# Altium PCB ADC-PCB.PcbDoc (part 1 of 2)
Units mil, origin at the board's own origin, x right, y up, seen from the top; angles counter-clockwise.
Board outline 3937.01 x 3937.01 mil, 2 copper layers (Top Layer, Bottom Layer); 145 components, 173 nets, 727 pads, 175 vias.
Unrouted connection lines stored in the file: 3.
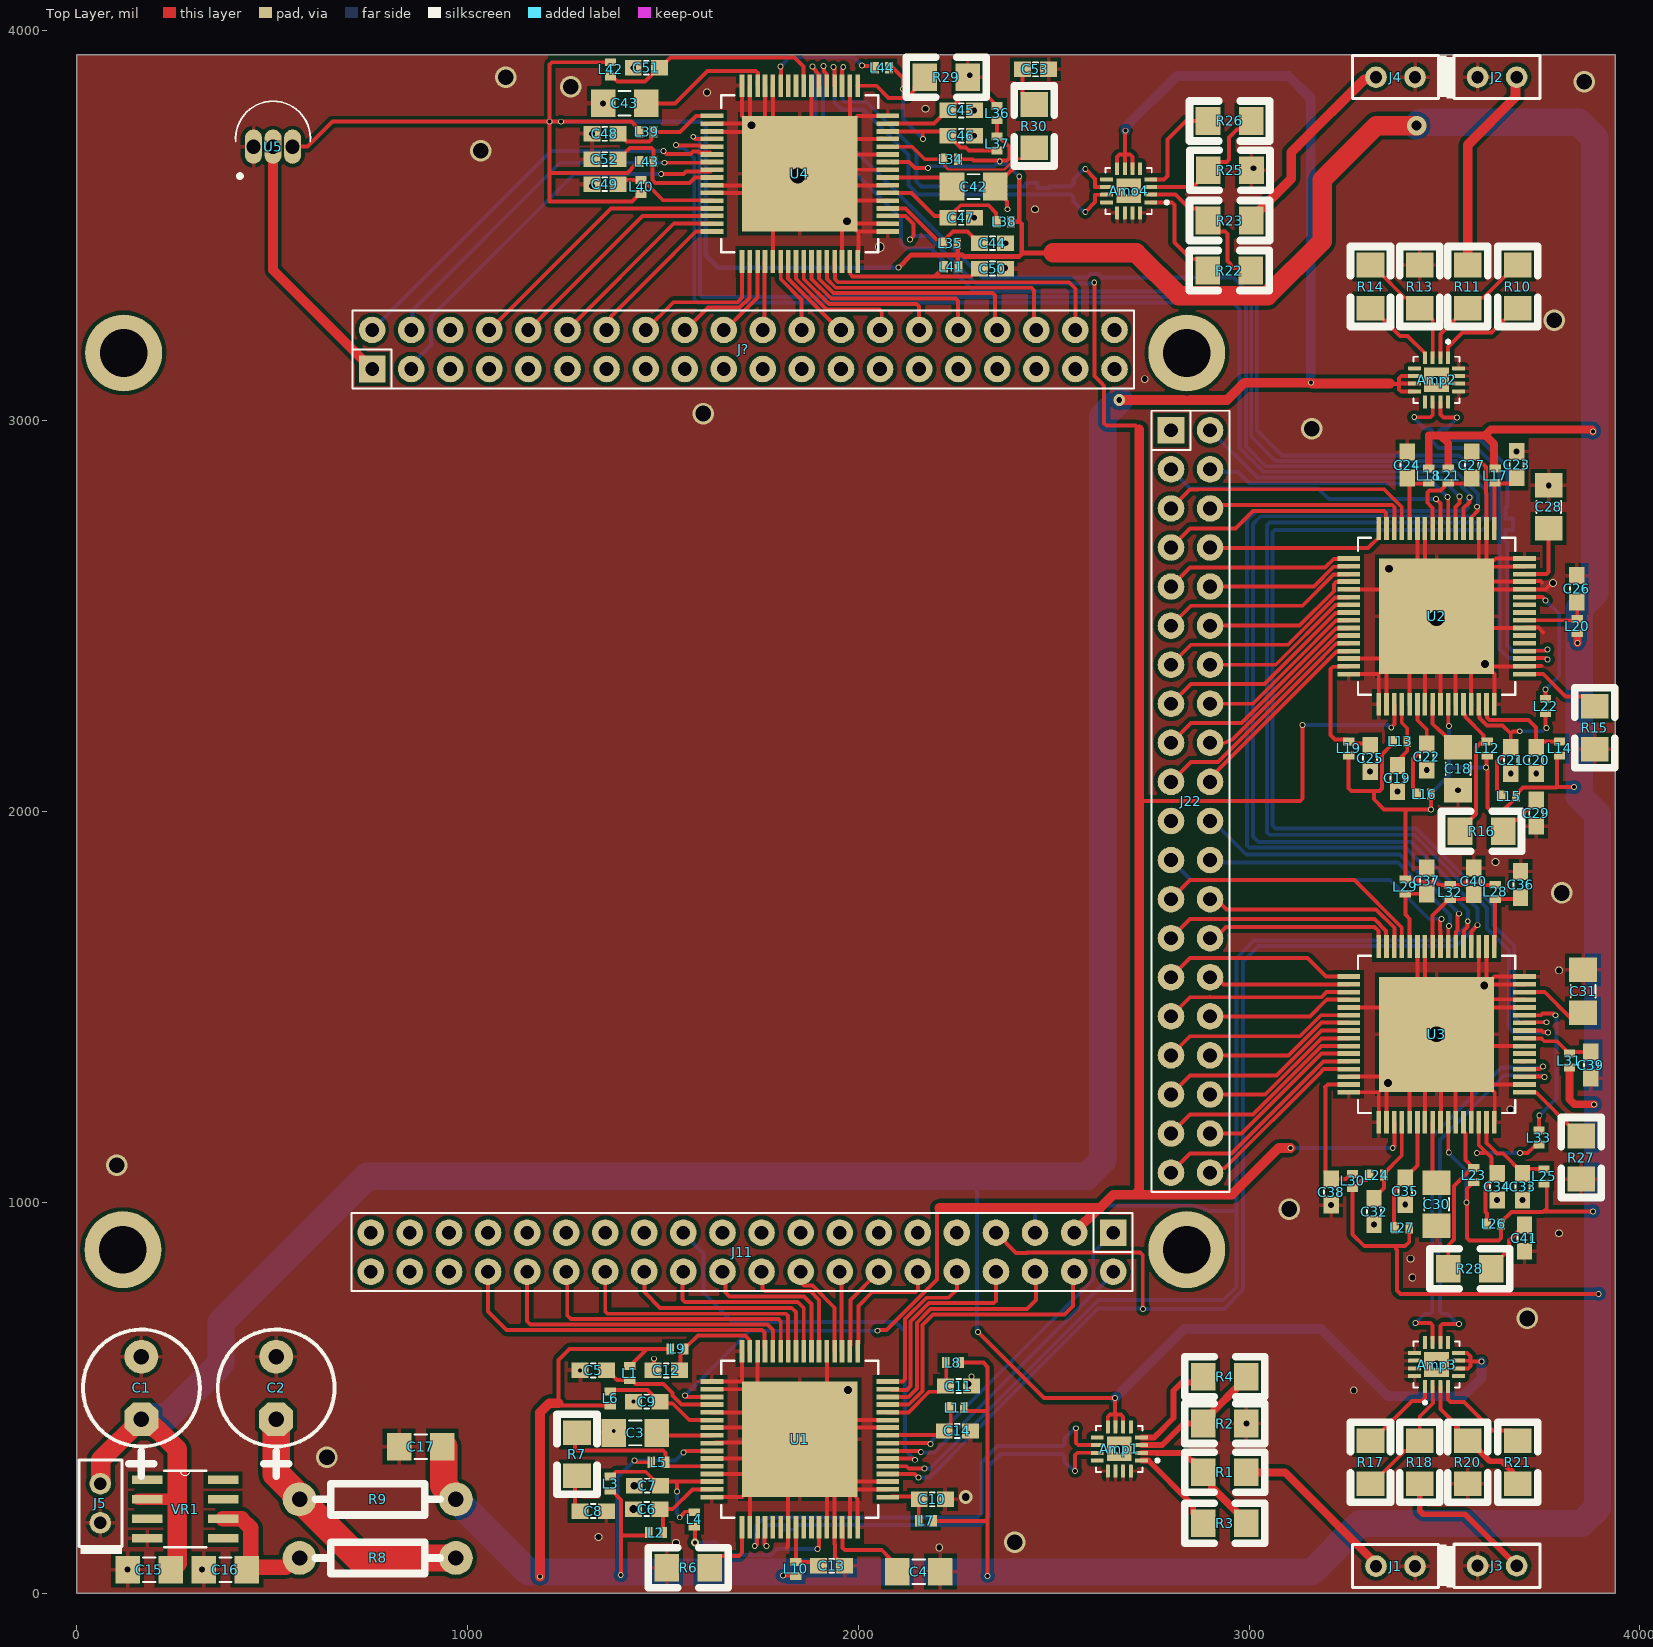
[diagram p0: Top Layer view]
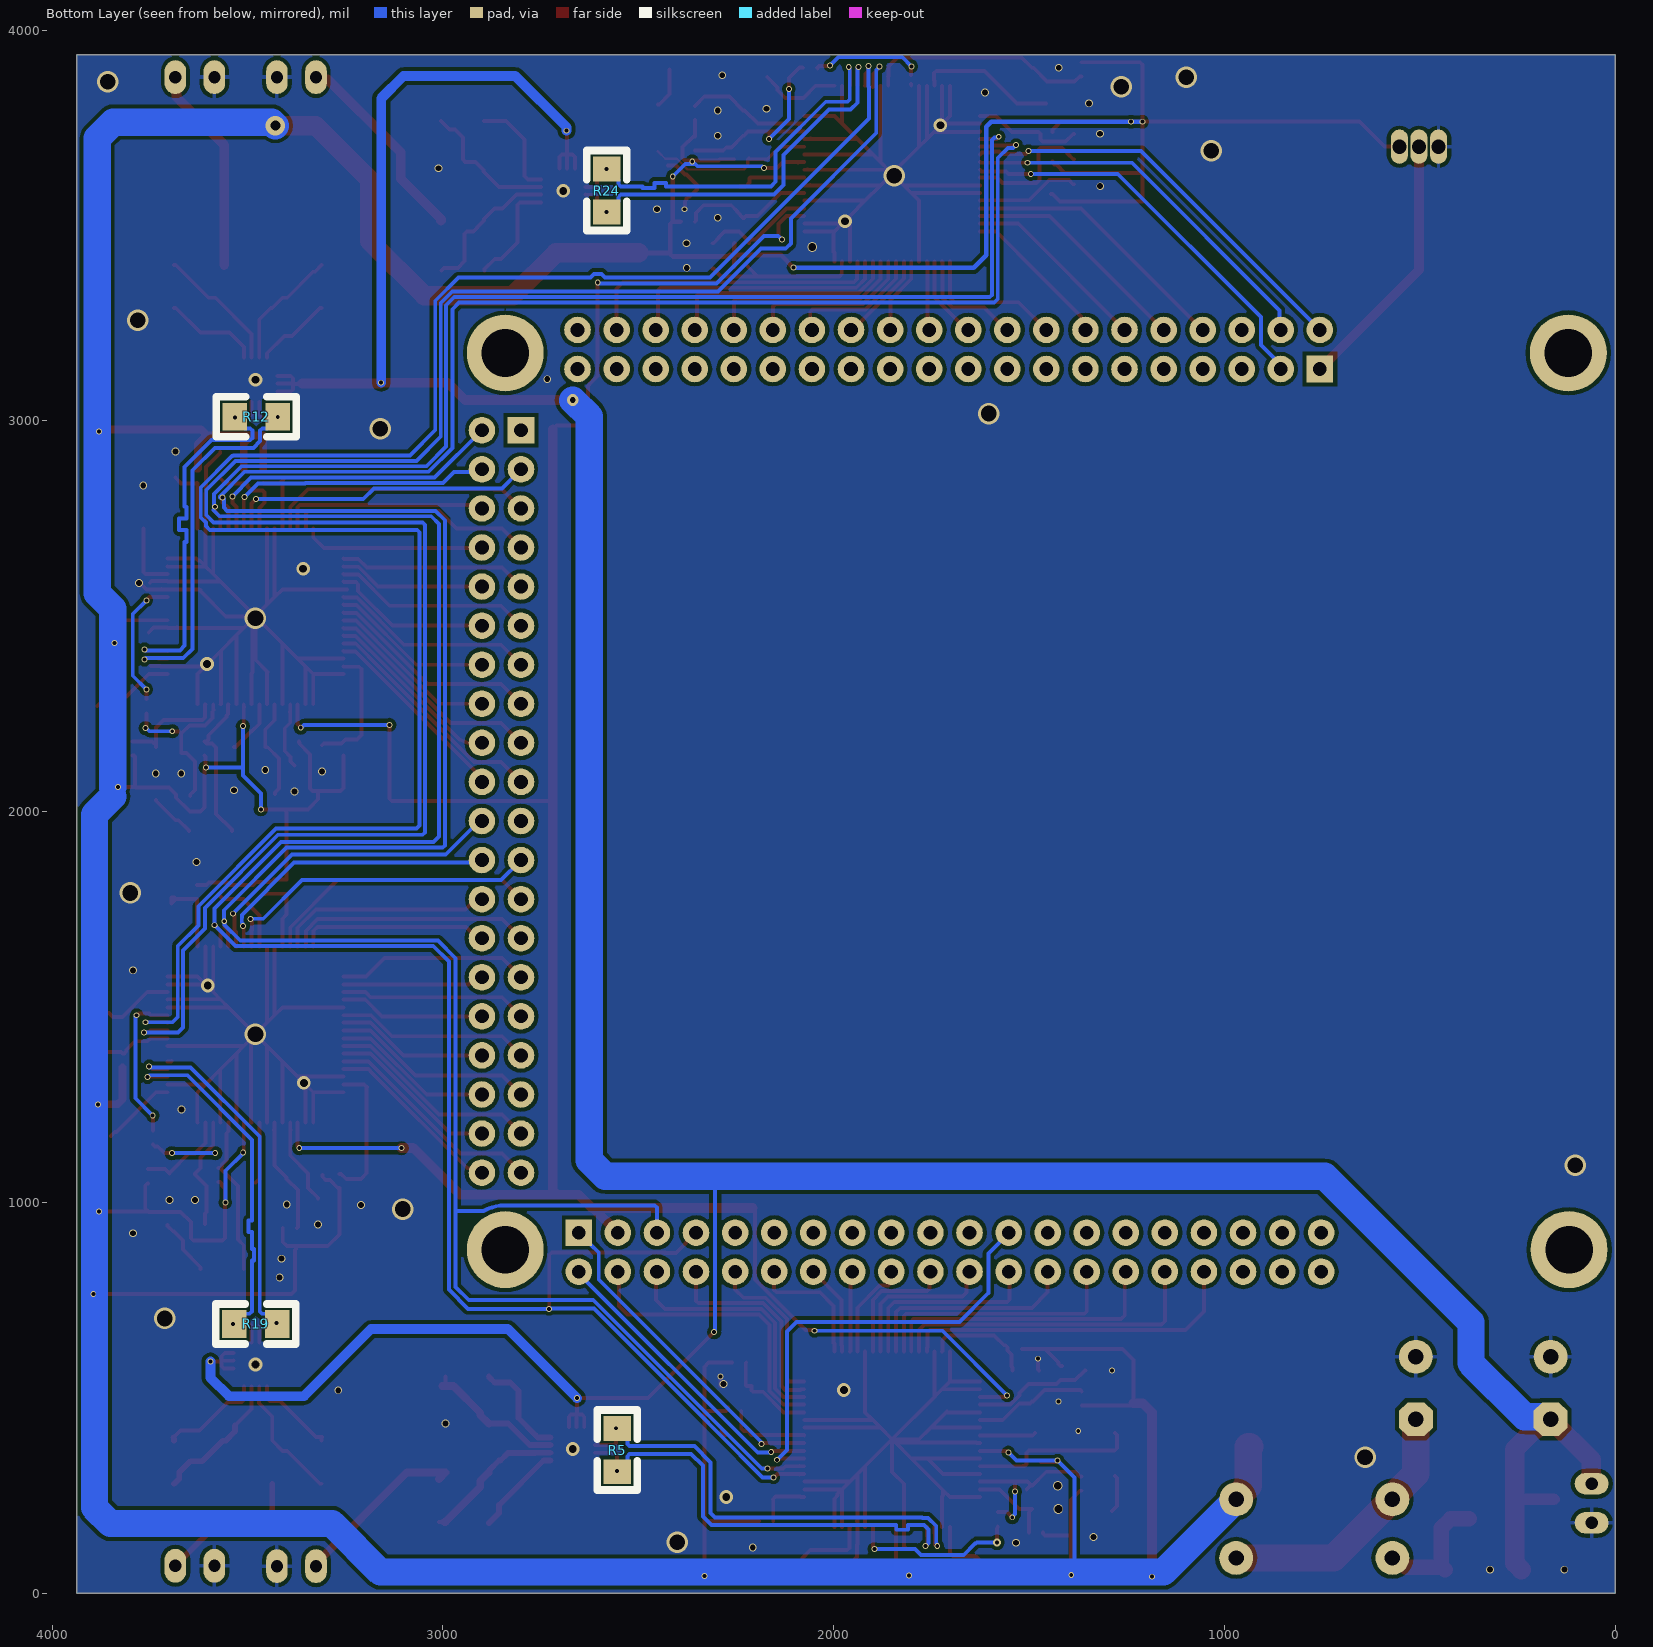
[diagram p1: Bottom Layer view, seen from below]

## Layer stack, top to bottom
Top Solder: solder mask 0.4, Solder Resist, Dk 3.5
Top Layer: signal copper 1.4
Dielectric5: dielectric 12.6, FR-4, Dk 4.8
Bottom Layer: signal copper 1.4
Bottom Solder: solder mask 0.4, Solder Resist, Dk 3.5

## Board outline
0,0 0,3937.01 3937.01,3937.01 3937.01,0

## Design rules (kind name [scope] priority, off if disabled: settings)
Clearance [All] p1: gap=10 ignorepadtopadclearanceinfootprint=FALSE except(0: Arc-Hole Track-Hole SMDPad-Hole THPad-Hole Via-Hole Fill-Hole Poly-Hole Region-Hole Text-Hole; 3.94: Arc-Arc Arc-Track Arc-SMDPad Track-Track Track-SMDPad SMDPad-SMDPad THPad-THPad)
DiffPairsRouting [All] p1: maxlimit=10 minlimit=5 mostfreqgap=10 toplayer_minwidth=5 toplayer_maxwidth=15 toplayer_prefwidth=15 bottomlayer_minwidth=5 bottomlayer_maxwidth=15 bottomlayer_prefwidth=15 maxuncoupledlength=500
PolygonConnect [All] p1: thpad.connectstyle=Relief thpad.reliefconductorwidth=10 thpad.reliefentries=4 thpad.polygonreliefangle="90 Angle" thpad.airgapwidth=10 smdpad.connectstyle=Relief smdpad.reliefconductorwidth=10 smdpad.reliefentries=4 smdpad.polygonreliefangle="90 Angle" smdpad.airgapwidth=10 via.connectstyle=Direct via.reliefconductorwidth=10 via.reliefentries=4 via.polygonreliefangle="90 Angle" via.airgapwidth=10
RoutingVias [All] p1: holewidth=50 width=50 viastyle="Through Hole" minholewidth=5 minwidth=5 maxholewidth=100 maxwidth=100
SolderMaskExpansion [All] p1: expansion=4 istentingtop=FALSE
Width [All] p1: maxlimit=100 minlimit=5 preferedwidth=10
29 further rules are at their usual default settings.

## Classes and differential pairs
differential pair OUT4: +OUT4_P -OUT4_N
differential pair OUT3: +OUT3_P -OUT3_N
differential pair OUT2: +OUT2_P -OUT2_N
differential pair OUT1: +OUT1_P -OUT1_N

## Components (designator, comment, footprint, x,y, rotation, side; value= is the part's Value field where it differs from the comment)
Amo4 "AD4945" AD4945 2692,3589 r180 top
Amp1 "AD4945" AD4945 2668,369 r180 top
Amp2 "AD4945" AD4945 3480,3105.39 r270 top
Amp3 "AD4945" AD4945 3480,585 r90 top
C1 "10uF" "CAP POL" 165,525 r90 top
C2 "100uF" "CAP POL" 510,525 r90 top
C3 "100nF" CAP-SMD 1429.13,410 r0 top
C4 "33pF" CAP-SMD 2154.88,55 r180 top
C5 "Cap0603" CAP0603 1321.54,570 r180 top
C6 "Cap0603" CAP0603 1458.46,215 r180 top
C7 "Cap0603" CAP0603 1460,275 r180 top
C8 "Cap0603" CAP0603 1321.54,210 r0 top
C9 "Cap0603" CAP0603 1458.5,490 r180 top
C10 "Cap0603" CAP0603 2189.46,240 r0 top
C11 "Cap0603" CAP0603 2256.54,530 r0 top
C12 "Cap0603" CAP0603 1508.46,570 r180 top
C13 "Cap0603" CAP0603 1931.54,70 r0 top
C14 "Cap0603" CAP0603 2253.46,415 r0 top
C15 "100nF" CAP-SMD 185.12,60 r180 top
C16 "100nF" CAP-SMD 380.12,60 r180 top
C17 "10nF" CAP-SMD 880,375 r180 top
C18 "100nF" CAP-SMD 3535,2110.12 r90 top
C19 "Cap0603" CAP0603 3380,2085 r270 top
C20 "Cap0603" CAP0603 3735,2131.54 r270 top
C21 "Cap0603" CAP0603 3670,2131.54 r270 top
C22 "Cap0603" CAP0603 3455,2140 r270 top
C23 "Cap0603" CAP0603 3685,2888.46 r90 top
C24 "Cap0603" CAP0603 3405,2887 r90 top
C25 "Cap0603" CAP0603 3310,2136.54 r270 top
C26 "Cap0603" CAP0603 3839,2570.54 r90 top
C27 "Cap0603" CAP0603 3570,2887 r90 top
C28 "33pF" CAP-SMD 3767,2780.12 r270 top
C29 "Cap0603" CAP0603 3735,1996.54 r270 top
C30 "100nF" CAP-SMD 3480,995.12 r90 top
C31 "33pF" CAP-SMD 3855,1540.12 r270 top
C32 "Cap0603" CAP0603 3320,976.54 r270 top
C33 "Cap0603" CAP0603 3700,1040 r270 top
C34 "Cap0603" CAP0603 3635,1040 r270 top
C35 "Cap0603" CAP0603 3400,1028.46 r270 top
C36 "Cap0603" CAP0603 3695,1813.46 r90 top
C37 "Cap0603" CAP0603 3455,1822.76 r90 top
C38 "Cap0603" CAP0603 3210,1026.54 r270 top
C39 "Cap0603" CAP0603 3875,1351.54 r270 top
C40 "Cap0603" CAP0603 3575,1822.01 r90 top
C41 "Cap0603" CAP0603 3705,908.46 r270 top
C42 "100nF" CAP-SMD 2295,3600 r180 top
C43 "33pF" CAP-SMD 1401.88,3813 r0 top
C44 "Cap0603" CAP0603 2343.46,3455 r0 top
C45 "Cap0603" CAP0603 2263.46,3795 r0 top
C46 "Cap0603" CAP0603 2263.46,3730 r0 top
C47 "Cap0603" CAP0603 2263.46,3520 r0 top
C48 "Cap0603" CAP0603 1351.54,3735 r180 top
C49 "Cap0603" CAP0603 1351.46,3606 r180 top
C50 "Cap0603" CAP0603 2343.46,3390 r0 top
C51 "Cap0603" CAP0603 1457.46,3904 r180 top
C52 "Cap0603" CAP0603 1351.54,3670 r180 top
C53 "Cap0603" CAP0603 2453.46,3900 r0 top
J1 "HDR" HDRLP_M_1X2 3375,69 r180 top value=HDRF2
J2 "HDR" HDRLP_M_1X2 3635,3880 r0 top value=HDRF2
J3 "HDR" HDRLP_M_1X2 3635,70 r0 top value=HDRF2
J4 "HDR" HDRLP_M_1X2 3375,3880 r180 top value=HDRF2
J5 "HDR" HDRLP_M_1X2 60,230 r90 top value=HDRF2
J11 "HDRF_2X20" ZUNQ 2652.34,912.7 r180 top locked
J22 "HDRF_2X20" ZUNQ 2810.34,2976.2 r270 top locked
J? "HDRF_2X20" ZUNQ 755.64,3143 r0 top locked
L1 "Inductor" INDC#1 1415,563.11 r90 top
L2 "Inductor" INDC#1 1481.89,155 r180 top
L3 "Inductor" INDC#1 1365,280 r270 top
L4 "Inductor" INDC#1 1580,189 r270 top
L5 "Inductor" INDC#1 1488.11,335 r180 top
L6 "Inductor" INDC#1 1365,498.11 r270 top
L7 "Inductor" INDC#1 2172.89,185 r0 top
L8 "Inductor" INDC#1 2241.89,590 r0 top
L9 "Inductor" INDC#1 1536.89,625 r180 top
L10 "Inductor" INDC#1 1840,61.89 r270 top
L11 "Inductor" INDC#1 2251.89,475 r0 top
L12 "Inductor" INDC#1 3610,2161.89 r270 top
L13 "Inductor" INDC#1 3386.89,2180 r180 top
L14 "Inductor" INDC#1 3795,2161.89 r270 top
L15 "Inductor" INDC#1 3665,2040 r0 top
L16 "Inductor" INDC#1 3448.11,2045 r0 top
L17 "Inductor" INDC#2 3630,2860 r90 top
L18 "Inductor" INDC#1 3460,2860 r90 top
L19 "Inductor" INDC#1 3255,2161.89 r270 top
L20 "Inductor" INDC#1 3840,2475 r270 top
L21 "Inductor" INDC#1 3510,2860 r90 top
L22 "Inductor" INDC#1 3759,2269.89 r90 top
L23 "Inductor" INDC#1 3575,1070 r270 top
L24 "Inductor" INDC#1 3326.89,1070 r180 top
L25 "Inductor" INDC#1 3755,1066.89 r270 top
L26 "Inductor" INDC#1 3626.89,945 r0 top
L27 "Inductor" INDC#1 3391.89,935 r0 top
L28 "Inductor" INDC#1 3630,1795 r90 top
L29 "Inductor" INDC#1 3400,1808.11 r90 top
L30 "Inductor" INDC#1 3265,1055 r270 top
L31 "Inductor" INDC#1 3820,1363.11 r270 top
L32 "Inductor" INDC#1 3515,1794.33 r90 top
L33 "Inductor" INDC#1 3742,1166.11 r90 top
L34 "Inductor" INDC#1 2236.89,3670 r0 top
L35 "Inductor" INDC#1 2235,3455 r0 top
L36 "Inductor" INDC#1 2355,3788.11 r270 top
L37 "Inductor" INDC#1 2355,3710 r90 top
L38 "Inductor" INDC#1 2373.11,3510 r0 top
L39 "Inductor" INDC#1 1458.11,3740 r180 top
L40 "Inductor" INDC#1 1444,3598.89 r270 top
L41 "Inductor" INDC#1 2238.11,3395 r0 top
L42 "Inductor" INDC#1 1366,3900.11 r90 top
L43 "Inductor" INDC#1 1458.11,3664 r180 top
L44 "Inductor" INDC#1 2060.89,3904 r180 top
R1 "499Ω" RES-SMD-1206 2938.12,309 r270 top
R2 "499Ω" RES-SMD-1206 2938.12,434 r270 top
R3 "499Ω" RES-SMD-1206 2937.88,179 r270 top
R4 "499Ω" RES-SMD-1206 2938.12,554 r270 top
R5 "1kΩ" RES-SMD-1206 2554,366.12 r0 bottom
R6 "160kΩ" RES-SMD-1206 1564.88,65 r270 top
R7 "160kΩ" RES-SMD-1206 1280,355.12 r180 top
R8 "100Ω" RES 770,90 r90 top
R9 "10Ω" RES 770,240 r90 top
R10 "499Ω" RES-SMD-1206 3688,3344.12 r0 top
R11 "499Ω" RES-SMD-1206 3560,3344.12 r0 top
R12 "1kΩ" RES-SMD-1206 3477.88,3011 r90 bottom
R13 "499Ω" RES-SMD-1206 3437,3344.12 r0 top
R14 "499Ω" RES-SMD-1206 3311,3344.12 r0 top
R15 "160kΩ" RES-SMD-1206 3885,2214.88 r0 top
R16 "160kΩ" RES-SMD-1206 3595.12,1950 r270 top
R17 "499Ω" RES-SMD-1206 3310.98,335.12 r180 top
R18 "499Ω" RES-SMD-1206 3437.01,335.12 r180 top
R19 "1kΩ" RES-SMD-1206 3478.88,689 r270 bottom
R20 "499Ω" RES-SMD-1206 3560,334.88 r180 top
R21 "499Ω" RES-SMD-1206 3687.99,334.88 r180 top
R22 "499Ω" RES-SMD-1206 2949.12,3385 r270 top
R23 "499Ω" RES-SMD-1206 2950.12,3513 r270 top
R24 "1kΩ" RES-SMD-1206 2581,3589.88 r0 bottom
R25 "499Ω" RES-SMD-1206 2951.12,3642 r270 top
R26 "499Ω" RES-SMD-1206 2950.12,3768 r270 top
R27 "160kΩ" RES-SMD-1206 3850,1114.88 r0 top
R28 "160kΩ" RES-SMD-1206 3565,830 r270 top
R29 "160kΩ" RES-SMD-1206 2225.12,3880 r90 top
R30 "160kΩ" RES-SMD-1206 2450,3754.88 r0 top
U1 "AD7762" AD7762 1850.39,393.7 r0 top locked
U2 "AD7762" AD7762 3480,2500 r90 top
U3 "AD7762" AD7762 3480,1430 r90 top
U4 "AD7762" AD7762 1850.39,3633 r180 top locked
U5 "DS18B20" DS1820 502,3732 r0 top
VR1 "ADR434" ADR434 277,215 r0 top

## Footprints (in the part's own frame and the unit in brackets; to place one, negate y for a bottom-side part, rotate by r counter-clockwise, add the part's x,y. Pads: shape width x height; smd on the part's side, far side on the other; paste and mask are expansions set on the pad)
AD4945 [mm]
  rrect25% 0.84x0.26 smd: 1(-1.435,0.75) 2(-1.435,0.25) 3(-1.435,-0.25) 4(-1.435,-0.75) 9(1.435,-0.75) 10(1.435,-0.25) 11(1.435,0.25) 12(1.435,0.75)
  rrect25% 0.26x0.84 smd: 5(-0.75,-1.435) 6(-0.25,-1.435) 7(0.25,-1.435) 8(0.75,-1.435) 13(0.75,1.435) 14(0.25,1.435) 15(-0.25,1.435) 16(-0.75,1.435)
  rect 1.6x1.6 smd paste-2: 17(0,0)
  silkscreen extent -2.57,-1.5 1.5,1.5, body extent -1.55,-1.55 1.55,1.55, height 0.81
AD7762 [mil]
  rect 58x12 smd: 1(-225,148) 2(-225,128) 3(-225,108) 4(-225,89) 5(-225,69) 6(-225,49) 7(-225,30) 8(-225,10) 9(-225,-10) 10(-225,-30) 11(-225,-49) 12(-225,-69) 13(-225,-89) 14(-225,-108) 15(-225,-128) 16(-225,-148) 33(225,-148) 34(225,-128) 35(225,-108) 36(225,-89) 37(225,-69) 38(225,-49) 39(225,-30) 40(225,-10) 41(225,10) 42(225,30) 43(225,49) 44(225,69) 45(225,89) 46(225,108) 47(225,128) 48(225,148)
  rect 12x58 smd: 17(-148,-225) 18(-128,-225) 19(-108,-225) 20(-89,-225) 21(-69,-225) 22(-49,-225) 23(-30,-225) 24(-10,-225) 25(10,-225) 26(30,-225) 27(49,-225) 28(69,-225) 29(89,-225) 30(108,-225) 31(128,-225) 32(148,-225) 49(148,225) 50(128,225) 51(108,225) 52(89,225) 53(69,225) 54(49,225) 55(30,225) 56(10,225) 57(-10,225) 58(-30,225) 59(-49,225) 60(-69,225) 61(-89,225) 62(-108,225) 63(-128,225) 64(-148,225)
  rect 295x295 smd: 65(0,0)
  silkscreen extent -201,-201 201,201, body extent -236,-236 236,236, height 63
ADR434 [mil]
  rect 78x22 smd: 1(-97,75) 2(-97,25) 3(-97,-25) 4(-97,-75) 5(97,-75) 6(97,-25) 7(97,25) 8(97,75)
  silkscreen extent -54,-98 54,98, body extent -118,-96 118,96, height 66
CAP0603 [mm]
  rect 1.1x1 smd: 1(-0.85,0) 2(0.85,0)
  silkscreen extent -0.15,-0.45 0.15,0.45, body extent -0.8,-0.4 0.8,0.4, height 0.9
"CAP POL" [mm]
  oct 2.2x2.2 hole 1: a(-2.032,0)
  round 2.2 hole 1: b(2.032,0)
  silkscreen extent -5.73,-3.8 3.8,3.8, body extent -4,-4.06 4,3.94, height 1.5
CAP-SMD [mm]
  rect 1.6x1.8 smd: 1(-1.4,0) 2(1.4,0)
  silkscreen extent -0.4,-0.8 0.4,0.8, body extent -1.6,-0.84 1.6,0.76, height 1.5
DS1820 [mm]
  oval 1.11x2.22 hole 0.93: 1(-1.27,-0.76) 2(0,-0.76) 3(1.27,-0.76)
  silkscreen extent -2.43,-2.79 2.43,2.2, body extent -2.28,-1.9 2.29,1.71, height 19.18
HDRLP_M_1X2 [mm] "Connector Socket, Single-row 1-position, 0.100\" pitch"
  round 1.4 / inner round 1.4 / far side oval 1.4x2.2 hole 0.8 mask+0.1: 1(-1.27,0) 2(1.27,0)
  silkscreen extent -3.3,-1.4 2.8,1.4, body extent -2.73,-1.27 2.73,1.27, height 6.78
INDC#1 [mm]
  rect 0.51x0.73 smd: 1(-0.46,0) 2(0.46,0)
  body extent -0.5,-0.3 0.5,0.3, height 0.6
INDC#2 [mm]
  rect 0.51x0.724 smd: 1(-0.46,0)
  rect 0.51x0.73 smd: 2(0.46,0)
  body extent -0.5,-0.3 0.5,0.3, height 0.6
RES [mm]
  round 2.2 hole 1: 1(0,5.08) 2(0,-5.08)
  silkscreen extent -1.02,-4.06 1.02,4.06, body extent -1.78,-5.38 1.73,5.33, height 3.54
RES-SMD-1206 [mm]
  rect 1.8x1.6 smd: 1(0,1.4) 2(0,-1.4)
  silkscreen extent -1.3,-2.6 1.3,2.6, body extent -0.84,-1.6 0.82,1.6, height 0.53
ZUNQ [mil]
  rect 68x68 hole 35: 1(0,-10)
  round 68 hole 35: 2(0,90) 3(100,-10) 4(100,90) 5(200,-10) 6(200,90) 7(300,-10) 8(300,90) 9(400,-10) 10(400,90) 11(500,-10) 12(500,90) 13(600,-10) 14(600,90) 15(700,-10) 16(700,90) 17(800,-10) 18(800,90) 19(900,-10) 20(900,90) 21(1000,-10) 22(1000,90) 23(1100,-10) 24(1100,90) 25(1200,-10) 26(1200,90) 27(1300,-10) 28(1300,90) 29(1400,-10) 30(1400,90) 31(1500,-10) 32(1500,90) 33(1600,-10) 34(1600,90) 35(1700,-10) 36(1700,90) 37(1800,-10) 38(1800,90) 39(1900,-10) 40(1900,90)
  silkscreen extent -50,-60 1950,140

## Part data
Amo4 Amp1 Amp2 Amp3: "ADC Driver IC Data Acquisition 16-LFCSP (3x3)", Package="LFCSP -16 Analog Devices", Availability=Warning, MF="Analog Devices", Mouser-Purchase-URL=https://snapeda.com/shop?store=Mouser&id=4333092, MP=ADA4945-1ACPZ-R7, Price=None, SnapEDA_Link=https://www.snapeda.com/parts/ADA4945-1ACPZ-R7/Analog%20Devices/view-part/4333092/?ref=snap
C1 C2: library part "CAP Pol"
C3 C4 C15 C16 C17 C18 C28 C30 C31 C42 C43: library part CAP-smd
C5 C6 C7 C8 C9 C10 C11 C12 C13 C14 C19 C20 C21 C22 C23 C24 C25 C26 C27 C29 C32 C33 C34 C35 C36 C37 C38 C39 C40 C41 C44 C45 C46 C47 C48 C49 C50 C51 C52 C53: "0.1 ÂµF Â±10% 50V Ceramic Capacitor X7R 0603 (1608 Metric)", Package="0603 Yageo", Check_prices=https://www.snapeda.com/parts/CC0603KRX7R9BB104/Yageo/view-part/?ref=eda, MF=Yageo, MP=CC0603KRX7R9BB104, SnapEDA_Link=https://www.snapeda.com/parts/CC0603KRX7R9BB104/Yageo/view-part/?ref=snap
J1 J2 J3 J4 J5: library part HDRR_F_1X2, "CONN, HEADER, Female, pitch: 2.54mm, 2POS", =http://www.chila.ir
J11 J22 J?: library part HDRR_F_2X20, "CONN, HEADER, Female, pitch: 2.54mm, 40POS", =http://www.chila.ir
L1 L2 L3 L4 L5 L6 L7 L8 L9 L10 L11 L12 L13 L14 L15 L16 L17 L18 L19 L20 L21 L22 L23 L24 L25 L26 L27 L28 L29 L30 L31 L32 L33 L34 L35 L36 L37 L38 L39 L40 L41 L42 L43 L44: "Inductor with Inductance: 15nH Tol. +/-3%, Package: 0402 (1005)", Package="1006 Murata", Availability=Good, DigiKey-Purchase-URL=https://snapeda.com/shop?store=DigiKey&id=1499752, MF=Murata, Mouser-Purchase-URL=https://snapeda.com/shop?store=Mouser&id=1499752, MP=LQW15AN15NH00D, Price=None, SnapEDA_Link=https://www.snapeda.com/parts/LQW15AN15NH00D/Murata%20Electronics%20North%20America/view-part/1499752/?ref=snap
R1 R2 R3 R4 R5 R6 R7 R10 R11 R12 R13 R14 R15 R16 R17 R18 R19 R20 R21 R22 R23 R24 R25 R26 R27 R28 R29 R30: library part RES-SMD
R8 R9: library part RES
U1 U2 U3 U4: "ADC, 24-Bit, 2.5MSPS, Sigma-Delta, Parallel Interface, SV-64-2", =http://www.chila.ir, DIST#=Mouser/584-AD7760BSVZ, MANF="Analog Devices", MANF_P#=AD7760BSVZ
U5: "Temperature Sensor Digital, Local -55Â°C ~ 125Â°C 12 b 8-uMAX-EP", Package="TO-226-3 Maxim", Availability="In Stock", Check_prices=https://www.snapeda.com/parts/DS18B20/Maxim+Integrated/view-part/?ref=eda, MF=Maxim, MP=DS18B20, Price=None, Purchase-URL=https://pricing.snapeda.com/search/part/DS18B20/?ref=eda, SnapEDA_Link=https://www.snapeda.com/parts/DS18B20/Maxim+Integrated/view-part/?ref=snap
VR1: "ÐžÐ¿Ð¾Ñ€Ð½Ð¾Ðµ Ð½Ð°Ð¿Ñ€ÑÐ¶ÐµÐ½Ð¸Ðµ ÑÐµÑ€Ð¸Ð¸ IC Ð¤Ð¸ÐºÑÐ¸Ñ€Ð¾Ð²Ð°Ð½Ð½Ð¾Ðµ 4,096 Ð’ Â±0,04% 30 Ð¼Ð 8-SOIC", Package="SOIC-8 Analog Devices", Availability="In Stock", Check_prices=https://www.snapeda.com/parts/ADR434BRZ/Analog%20Devices%20Inc./view-part/436542/?ref=eda, MF="Analog Devices", MP=ADR434BRZ, Price=None, Purchase-URL=https://pricing.snapeda.com/search/part/ADR434BRZ/?ref=eda, SnapEDA_Link=https://www.snapeda.com/parts/ADR434BRZ/Analog%20Devices%20Inc./view-part/436542/?ref=snap

## Free pads (board coordinates)
  round 196.85 hole 122.05: 1(117.74,879.1) 1(119.74,3174.1) 1(2840.74,879.1) 1(2840.74,3174.1)

## Via types
v1: diameter 15, hole 10, Top Layer to Bottom Layer, 98 vias
v2: diameter 20, hole 15, Top Layer to Bottom Layer, 43 vias
v3: diameter 55, hole 40, Top Layer to Bottom Layer, 16 vias
v4: diameter 35, hole 20, Top Layer to Bottom Layer, 12 vias
v5: diameter 25, hole 20, Top Layer to Bottom Layer, 3 vias
v6: diameter 30, hole 15, Top Layer to Bottom Layer, 1 vias
v7: diameter 50, hole 25, Top Layer to Bottom Layer, 1 vias
v8: diameter 20, hole 10, Top Layer to Bottom Layer, 1 vias

## Nets (pads, with @x,y where several pads share a name; then routed paths per layer and width w, separated by ;. In a path a pad name is that pad's centre, name@x,y a point inside that pad or via, vN(x,y) a via of type N, cw(c..) or ccw(c..) an arc to the next point about the centre after c; other vN are vias at no path point)
1-DB0: J11.34 U1.61 | length 881.3
  Top Layer w10: J11.34@1052.34,822.7 1052.34,720.53 1099.68,673.19 1754.14,673.19 1760,667.33 1760,630 1760.39,630 1761.39,629 U1.61@1761.39,618.7
1-DB1: J11.32 U1.60 | length 820
  Top Layer w10: J11.32@1152.34,822.7 1152.34,695.86 1161.07,687.13 1767.87,687.13 1781.39,673.61 U1.60@1781.39,618.7
1-DB2: J11.30 U1.59 | length 742.3
  Top Layer w10: J11.30@1252.34,822.7 1255,820.04 1255,710.86 1264.79,701.06 1795.54,701.06 1801.39,695.21 U1.59@1801.39,618.7
1-DB3: J11.28 U1.58 | length 665.2
  Top Layer w10: J11.28@1352.34,822.7 1352.34,720.86 1358.2,715 1814.54,715 1820.39,709.14 U1.58@1820.39,618.7
1-DB4: J11.26 U1.57 | length 562.1
  Top Layer w10: J11.26@1452.34,822.7 1452.34,770.53 1492.87,730 1829.71,730 1840.39,719.32 U1.57@1840.39,618.7
1-DB5: J11.24 U1.56 | length 502.9
  Top Layer w10: J11.24@1552.34,822.7 1550,820.36 1550,750.86 1555.86,745 1845,745 1860.39,729.61 U1.56@1860.39,618.7
1-DB6: J11.22 U1.55 | length 410.4
  Top Layer w10: J11.22@1652.34,822.7 1652.34,812.66 1660,805 1660,768.94 1670,758.94 1861.06,758.94 1880.39,739.61 U1.55@1880.39,618.7
1-DB7: J11.20 U1.54 | length 335
  Top Layer w10: J11.20@1752.34,822.7 1752.34,817.34 1750,815 1755,810 1755,778.73 1760.86,772.87 1877.13,772.87 1899.39,750.61 U1.54@1899.39,618.7
1-DB8: J11.18 U1.52 | length 253
  Top Layer w10: J11.18@1852.34,822.7 1852.34,817.66 1855,815 1855,792.67 1860.86,786.81 1882.9,786.81 1939.39,730.32 U1.52@1939.39,618.7
1-DB9: J11.16 U1.51 | length 206.5
  Top Layer w10: J11.16@1952.34,822.7 1957.39,817.65 1957.39,619.7 U1.51@1958.39,618.7
1-DB10: J11.14 U1.50 | length 235
  Top Layer w10: U1.50@1978.39,618.7 1978.39,634 1979.39,635 1980,635 1980,750.36 J11.14@2052.34,822.7
1-DB11: J11.12 U1.49 | length 333.4
  Top Layer w10: U1.49@1998.39,618.7 1998.39,639 1999.39,640 2000,640 2000,735 2035,770 2146.48,770 2152.34,775.86 J11.12@2152.34,822.7
1-DB12: J11.10 U1.48 | length 410
  Top Layer w10: U1.48@2075.39,541.7 2114.14,541.7 2120,547.56 2120,701.35 2174.71,756.06 2231.06,756.06 2252.34,777.34 J11.10@2252.34,822.7
1-DB13: J11.8 U1.47 | length 544.3
  Top Layer w10: U1.47@2075.39,521.7 2084,521.7 2085,520.7 2085,520 2124.14,520 2133.94,529.79 2133.94,695.58 2180.48,742.13 2346.48,742.13 2352.34,747.98 J11.8@2352.34,822.7
1-DB14: J11.6 U1.46 | length 655
  Top Layer w10: U1.46@2075.39,501.7 2128.3,501.7 2150,523.4 2150,691.93 2185.19,727.13 2432.13,727.13 2455,750 2455,820.04 J11.6@2452.34,822.7
1-DB15: J11.4 U1.45 | length 766.5
  Top Layer w10: U1.45@2075.39,482.7 2129.01,482.7 2163.94,517.63 2163.94,686.16 2190.96,713.19 2528.19,713.19 2550,735 2550,820.36 J11.4@2552.34,822.7
2-DB0: J22.20 U2.61 | length 499.3
  Top Layer w10: J22.20@2900.34,2076.2 2900.34,2086.34 3224,2410 3254,2410 U2.61@3255,2411
2-DB1: J22.19 U2.60 | length 601.6
  Top Layer w10: J22.19@2800.34,2076.2 2851.34,2127.2 2920.46,2127.2 2932.42,2139.16 ccw(c2900.34,2176.2) 2937.38,2144.12 3161.09,2367.84 3223.26,2430 3254,2430 U2.60@3255,2431
2-DB2: J22.18 U2.59 | length 469.6
  Top Layer w10: J22.18@2900.34,2176.2 2915.64,2170.08 2919.49,2168.54 2959.04,2185.49 2960.4,2186.85 3147.16,2373.61 3223.55,2450 3254,2450 U2.59@3255,2451
2-DB3: J22.17 U2.58 | length 576.4
  Top Layer w10: J22.17@2800.34,2176.2 2851.34,2227.2 2981.04,2227.2 3133.19,2379.35 3222.84,2469 3254,2469 U2.58@3255,2470
2-DB4: J22.16 U2.57 | length 443.2
  Top Layer w10: J22.16@2900.34,2276.2 3010.33,2276.2 3119.25,2385.12 3223.13,2489 3254,2489 U2.57@3255,2490
2-DB5: J22.15 U2.56 | length 551.5
  Top Layer w10: J22.15@2800.34,2276.2 2851.34,2327.2 3039.2,2327.2 3221,2509 3254,2509 U2.56@3255,2510
2-DB6: J22.14 U2.55 | length 418.4
  Top Layer w10: J22.14@2900.34,2376.2 3068.49,2376.2 3221.29,2529 3254,2529 U2.55@3255,2530
2-DB7: J22.13 U2.54 | length 526.2
  Top Layer w10: J22.13@2800.34,2376.2 2851.34,2427.2 3099.78,2427.2 3220.58,2548 3254,2548 U2.54@3255,2549
2-DB8: J22.12 U2.52 | length 411.9
  Top Layer w10: J22.12@2900.34,2476.2 3129.07,2476.2 3217.06,2564.19 3217.06,2582.14 3222.92,2588 3254,2588 U2.52@3255,2589
2-DB9: J22.11 U2.51 | length 509.3
  Top Layer w10: J22.11@2800.34,2476.2 2851.34,2527.2 3136.55,2527.2 3216.35,2607 3254,2607 U2.51@3255,2608
2-DB10: J22.10 U2.50 | length 376.1
  Top Layer w10: J22.10@2900.34,2576.2 3165.84,2576.2 3216.64,2627 3254,2627 U2.50@3255,2628
2-DB11: J22.9 U2.49 | length 484.4
  Top Layer w10: J22.9@2800.34,2576.2 2849.14,2625 2895.92,2625 cw(c2900.34,2576.2) 2904.76,2625 3194.93,2625 3216.93,2647 3254,2647 U2.49@3255,2648
2-DB12: J22.8 U2.48 | length 466.3
  Top Layer w10: J22.8@2900.34,2676.2 2901.54,2675 3305,2675 3332,2702 U2.48@3332,2725
2-DB13: J22.7 U2.47 | length 631.5
  Top Layer w10: J22.7@2800.34,2676.2 2849.34,2725.2 2965.2,2725.2 3010,2770 3345.14,2770 3351,2764.14 3351,2726 U2.47@3352,2725
2-DB14: J22.6 U2.46 | length 531.9
  Top Layer w10: J22.6@2900.34,2776.2 2909.14,2785 3366.14,2785 3372,2779.14 U2.46@3372,2725
2-DB15: J22.5 U2.45 | length 684.6
  Top Layer w10: J22.5@2800.34,2776.2 2849.14,2825 2870,2825 2870.2,2825.2 3345.65,2825.2 3391,2779.85 U2.45@3391,2725
3-DB0: J22.40 U3.61 | length 474.7
  Top Layer w10: J22.40@2900.34,1076.2 2911.44,1087.3 2937.3,1087.3 3180,1330 3180,1330.29 3190.71,1341 U3.61@3255,1341
  Bottom Layer w10: J22.40@2900.34,1076.2 2908.8,1076.2 J22.40@2910,1075
3-DB1: J22.39 U3.60 | length 573.6
  Top Layer w10: J22.39@2800.34,1076.2 2849.34,1125.2 2939.8,1125.2 2940,1125 2955,1125 3191,1361 3234,1361 3235,1360 3236,1361 U3.60@3255,1361
3-DB2: J22.38 U3.59 | length 439.5
  Top Layer w10: J22.38@2900.34,1176.2 2981.2,1176.2 3186,1381 U3.59@3255,1381
3-DB3: J22.37 U3.58 | length 547.4
  Top Layer w10: J22.37@2800.34,1176.2 2849.34,1225.2 3010.2,1225.2 3185,1400 U3.58@3255,1400
3-DB4: J22.36 U3.57 | length 414.2
  Top Layer w10: J22.36@2900.34,1276.2 3041.49,1276.2 3185.29,1420 U3.57@3255,1420
3-DB5: J22.35 U3.56 | length 522.7
  Top Layer w10: J22.35@2800.34,1276.2 2849.34,1325.2 2949.92,1325.2 2950.12,1325 3070.58,1325 3185.58,1440 U3.56@3255,1440
3-DB6: J22.34 U3.55 | length 389.4
  Top Layer w10: J22.34@2900.34,1376.2 3101.2,1376.2 3185,1460 U3.55@3255,1460
3-DB7: J22.33 U3.54 | length 497.2
  Top Layer w10: J22.33@2800.34,1376.2 2849.34,1425.2 3130.2,1425.2 3184,1479 U3.54@3255,1479
3-DB8: J22.32 U3.52 | length 372.4
  Top Layer w10: J22.32@2900.34,1476.2 3156.2,1476.2 3199,1519 U3.52@3255,1519
3-DB9: J22.31 U3.51 | length 480.3
  Top Layer w10: J22.31@2800.34,1476.2 2849.14,1525 2895.92,1525 cw(c2900.34,1476.2) 2904.76,1525 3185.29,1525 3198.29,1538 U3.51@3255,1538
3-DB10: J22.30 U3.50 | length 362.2
  Top Layer w10: J22.30@2900.34,1576.2 2916.03,1576.2 2934.23,1558 U3.50@3255,1558
3-DB11: J22.29 U3.49 | length 494.5
  Top Layer w10: J22.29@2800.34,1576.2 2849.34,1625.2 3149.8,1625.2 3197,1578 U3.49@3255,1578
3-DB12: J22.28 U3.48 | length 487.3
  Top Layer w10: J22.28@2900.34,1676.2 2912.04,1676.2 2940.84,1705 3321.29,1705 3331,1695.29 3331,1679 3332,1678 U3.48@3332,1655
3-DB13: J22.27 U3.47 | length 623.9
  Top Layer w10: J22.27@2800.34,1676.2 2849.34,1725.2 3320.8,1725.2 3351,1695 3351,1656 U3.47@3352,1655
3-DB14: J22.26 U3.46 | length 550
  Top Layer w10: J22.26@2900.34,1776.2 2916.03,1776.2 2942.23,1750 3325,1750 3372,1703 U3.46@3372,1655
3-DB15: J22.25 U3.45 | length 710
  Top Layer w10: J22.25@2800.34,1776.2 2849.34,1825.2 3189.8,1825.2 3190,1825 3269.71,1825 3391,1703.71 U3.45@3391,1655
4-DB0: J?.38 U4.61 | length 777.4
  Top Layer w10: U4.61@1939.39,3408 1939.39,3385 1938.84,3384.45 1939.55,3384.45 1940,3384 1940,3362.97 1947.97,3355 2539.14,3355 2555.64,3338.5 J?.38@2555.64,3233
4-DB1: J?.36 U4.60 | length 690.5
  Top Layer w10: U4.60@1919.39,3408 1919.39,3363.86 1942.2,3341.06 2443.08,3341.06 2450,3334.14 2450,3245 2455.64,3239.36 J?.36@2455.64,3233
4-DB2: J?.34 U4.59 | length 602.8
  Top Layer w10: U4.59@1899.39,3408 1899.39,3364.15 1936.42,3327.13 2344.14,3327.13 2350,3321.27 2350,3238.64 J?.34@2355.64,3233
4-DB3: J?.32 U4.58 | length 517
  Top Layer w10: U4.58@1880.39,3408 1880.39,3363.45 1930.65,3313.19 2249.14,3313.19 2255,3307.33 2255,3233.64 J?.32@2255.64,3233
4-DB4: J?.30 U4.57 | length 440.4
  Top Layer w10: U4.57@1860.39,3408 1860.39,3363.74 1924.88,3299.25 2149.14,3299.25 2155,3293.39 2155,3235 2150,3230 2152.64,3230 J?.30@2155.64,3233
4-DB5: J?.28 U4.56 | length 346.9
  Top Layer w10: U4.56@1840.39,3408 1840.42,3364 1919.1,3285.31 2054.14,3285.31 2060,3279.46 2060,3237.36 J?.28@2055.64,3233
4-DB6: J?.26 U4.55 | length 233.3
  Top Layer w10: U4.55@1820.39,3408 1820.39,3364.32 1951.71,3233 J?.26@1955.64,3233
4-DB7: J?.24 U4.54 | length 197.5
  Top Layer w10: U4.54@1801.39,3408 1801.39,3363.61 1855,3310 1855,3233.64 J?.24@1855.64,3233
4-DB8: J?.22 U4.52 | length 177.4
  Top Layer w10: J?.22@1755.64,3233 1760.39,3237.75 1760.39,3407 U4.52@1761.39,3408
4-DB9: J?.20 U4.51 | length 212.9
  Top Layer w10: J?.20@1655.64,3233 1658.96,3233 1742.39,3316.44 U4.51@1742.39,3408
4-DB10: J?.18 U4.50 | length 293
  Top Layer w10: J?.18@1555.64,3233 1558,3233 1615,3290 1696.25,3290 1721.39,3315.15 1721.39,3407 U4.50@1722.39,3408
4-DB11: J?.16 U4.49 | length 373.2
  Top Layer w10: J?.16@1455.64,3233 1526.58,3303.94 1690.47,3303.94 1702.39,3315.86 U4.49@1702.39,3408
4-DB12: J?.14 U4.48 | length 388
  Top Layer w10: J?.14@1355.64,3233 1366.74,3244.1 1366.74,3267.74 1474.07,3375.07 1584,3485 U4.48@1625.39,3485
4-DB13: J?.12 U4.47 | length 482.4
  Top Layer w10: J?.12@1255.64,3233 1527.64,3505 U4.47@1625.39,3505
4-DB14: J?.10 U4.46 | length 590.7
  Top Layer w10: J?.10@1155.64,3233 1447.64,3525 U4.46@1625.39,3525
4-DB15: J?.8 U4.45 | length 698.6
  Top Layer w10: J?.8@1055.64,3233 1366.64,3544 U4.45@1625.39,3544
+2.5: C17.1 L1.2 L2.2 L3.2 L5.2 L6.2 L7.2 L8.2 L9.2 L10.2 L11.2 L12.2 L13.2 L14.2 L15.2 L16.2 L17.2 L18.2 L19.2 L20.2 L21.2 L23.2 L24.2 L25.2 L26.2 L27.2 L28.2 L29.2 L30.2 L31.2 L32.2 L34.2 L35.2 L36.2 L37.2 L38.2 L39.2 L40.2 L41.2 L42.2 L43.2 R9.2 U1.10 U2.10 U3.10 U4.10 U5.3 | length 20273.6
  Top Layer w10: U5.3@552,3702.07 590.07,3702.07 654,3766 v1(1210,3766) ; L3.2@1365,261.89 1369.33,261.89 1393,238.22 1393,147 ; L6.2@1365,480 1238.86,480 1233,485.86 1233,597 1261,625 1458.78,625 ; L42.2@1366,3918.22 1215.86,3918.22 1210,3912.36 v1(1210,3766) ; v1(1392,46) 1393,47 1393,147 ; L1.2@1415,581.22 1419.33,581.22 1424.37,586.26 1424.37,590.59 1458.78,625 ; v1@1432.35,335 L5.2@1470,335 ; L43.2@1440,3664 1440,3661.04 1434.96,3656 1430,3656 1409,3635 1214,3635 1210,3639 ; L39.2@1440,3740 1440,3744.33 1427,3757.33 1427,3759 1420,3766 v1(1239,3766) v1(1210,3766) ; L40.2@1444,3580.78 1439.67,3580.78 1420.49,3561.6 1210,3561.6 1210,3635 1210,3639 ; L2.2@1463.78,155 1463.78,152.04 1458.74,147 1393,147 ; L9.2@1518.78,625 1458.78,625 ; v1(1553,360) 1554.35,360 1558.05,363.7 U1.10@1625.39,363.7 ; v1(1807,45) 1807.61,44.39 1839.39,44.39 L10.2@1840,43.78 ; U4.10@2075.39,3663 2090,3663 2091,3662 2092,3663 2129.77,3663 2145.27,3647.5 v1(2178,3647.5) ; L7.2@2191,185 2330,185 2331,186 ; L34.2@2255,3670 2292,3670 2295,3667 2380.12,3667 2386.56,3673.44 2386.56,3700.88 2359.33,3728.11 L37.2@2355,3728.11 L36.2@2355,3770 ; L8.2@2260,590 2320.14,590 2331,579.14 2331,466 ; L11.2@2270,475 2270,471.04 2275.04,466 2331,466 ; v1(2331,44) 2331,186 ; L19.2@3255,2143.78 3255,2060 3262,2053 3320.12,2053 ; L24.2@3308.78,1070 3308.78,1065.67 3301,1057.89 3301,1057 3289.44,1057 3269.33,1036.89 L30.2@3265,1036.89 3265,918 3295,888 3376,888 ; L13.2@3368.78,2180 3368.78,2178.78 3367,2177 3367,2173.89 3340,2146.89 3340,2058.86 3334.14,2053 3320.12,2053 ; L27.2@3410,935 3410,899 3399,888 3376,888 ; L16.2@3466.22,2045 3466.11,2044.89 3466.11,2006.11 v1(3466,2006) 3406,2006 ; U3.10@3510,1205 3510,1129.38 v1(3511.38,1128) ; U2.10@3510,2275 3510,2269 3509,2268 3510,2267 3510,2222.35 3512,2220.35 v1(3512,2219) ; L23.2@3575,1051.89 3570.67,1051.89 3565.63,1046.85 3565.63,1042.52 3558,1034.89 3558,908.86 3563.86,903 3639.14,903 3645,908.86 L26.2@3645,945 3645,949.33 3671.61,975.94 3753.09,975.94 3754.14,977 ; v1(3607,2113) 3607.96,2113.96 3607.96,2141.74 L12.2@3610,2143.78 ; v1@3607.96,2111.65 3607.96,2110.69 3610,2108.65 3610,2011 3621,2000 3647.44,2000 3683.11,2035.67 L15.2@3683.11,2040 3683.11,2044.33 3700.78,2062 3786.14,2062 3787.14,2063 3788,2063 ; L28.2@3630,1813.11 3629.33,1812.44 3605.08,1812.44 3598.39,1819.13 3551.61,1819.13 3544.92,1812.44 L32.2@3515,1812.44 3514.8,1812.64 3485.63,1812.64 3478.39,1819.88 3437.36,1819.88 3431.02,1826.22 L29.2@3400,1826.22 3400,2000 3406,2006 ; L25.2@3755,1048.78 3756.96,1048.78 3762,1043.74 3762,984.86 3754.14,977 ; L14.2@3795,2143.78 3791.22,2143.78 3791,2144 3788,2141 3788,2063 ; v1(3832,2063) 3788,2063 ; v1(3880,977) 3754.14,977 ; v1(3895,766) 3387.86,766 3379,774.86 3379,878 3376,881 3376,888 ; 1210,3639 v1(1210,3766) ; 2331,186 2331,466 ; 3320.12,2053 3320.12,2031.88 3346,2006 3406,2006
  Top Layer w12: v1(2103,3392.5) 2135.5,3425 2254.67,3425 ; L35.2@2253.11,3455 2254.67,3453.44 2254.67,3425 ; L41.2@2256.22,3395 2254.67,3396.56 2254.67,3425 ; L38.2@2391.22,3510 2412.14,3510 ; v1(2412,3626) 2412.14,3625.86 2412.14,3510 ; 2499,3430 2418,3430 ; 2254.67,3425 2266,3425 2270,3421 2412.14,3421 2418,3426.86 2418,3430 ; 2412.14,3510 2418,3504.14 2418,3430
  Top Layer w20: L18.2@3460,2878.11 3460,2963 3490,2963 ; L21.2@3510,2878.11 3510,2943 3490,2963 ; L17.2@3630,2878.11 3627.04,2878.11 3627,2878.15 3627,2941.28 3605.28,2963 ; L31.2@3820,1345 3820,1264 3833,1251 v1(3883,1251) ; L20.2@3840,2456.89 3840.96,2456.89 3841,2456.85 v1(3841,2432) ; v1(3880,2973) 3880,2976 3878,2978 3619,2978 3605.28,2964.28 3605.28,2963 ; 3490,2963 3605.28,2963
  Top Layer w25: v1(1185,42) 1185,462 1208.86,485.86 1233,485.86
  Top Layer w50: 2499,3430 2711,3430 2820.37,3320.63 3047.72,3320.63 3186.86,3459.77 3186.86,3616.86 3326,3756 v7(3429,3756)
  Top Layer w70: C17.1@935.12,375 938.19,375 938.62,374.57 938.62,274.38 962,251 962,248 R9.2@970,240
  Bottom Layer w10: v1(1392,46) 1392,46.36 1384,54.36 1384,296 v1(1427,339) 1532,339 v1(1553,360) ; v1(2178,3647.5) 2179.35,3647.5 2183.85,3652 2348.3,3652 2354.47,3658.18 2379.82,3658.18 v1(2412,3626) ; v1(3466,2006) 3466,2047 3512,2093 3512,2113 ; v1(3511.38,1128) 3512.34,1127.04 3512.34,1125.66 3557,1081 v1(3557,1000) ; v1(3512,2219) 3512,2113 ; v1(3607,2113) 3512,2113
  Bottom Layer w12: v1(1210,3766) v1(1239,3766) 1597,3766 1609.71,3753.29 1609.71,3424 1641.21,3392.5 v1(2103,3392.5)
  Bottom Layer w70: R9.2@970,240 1156,54 1415,54 1807,54 2331,54 3160,54 3284,178 3850.99,178 3892,219.01 3892,766 3892,977 3892,1251 3892,1992 3845,2039 ; v7(3429,3756) 3438,3765 3843.99,3765 3885,3723.99 3885,2973 3885,2559 3845,2519 3845,2432 3845,2063
  other v1: 2362,3664.35
+10: Amo4.6 Amo4.7 Amo4.8 Amp1.6 Amp1.7 Amp1.8 Amp2.6 Amp2.7 Amp2.8 Amp3.6 Amp3.7 Amp3.8 C1.a C15.1 J5.2 VR1.2 | length 10179
  Top Layer w10: v1(2306,668) 2475,499 v1(2657,499) 2657.36,498.64 2657.36,457 ; Amp1.8@2638.47,425.5 2638.47,451.12 2644.35,457 2657.36,457 ; Amp1.7@2658.16,425.5 2658.16,456.2 2657.36,457 ; Amo4.8@2662.47,3645.5 2662.47,3675.47 2669,3682 2683.07,3682 ; Amp1.6@2677.84,425.5 2677.84,435.88 2677.96,436 2677.72,436.24 2677.72,451.14 2671.87,457 2657.36,457 ; Amo4.7@2682.16,3645.5 2682.16,3681.09 2683.07,3682 ; v1(2684,3743) 2683.07,3742.07 2683.07,3682 ; Amo4.6@2701.84,3645.5 2701.84,3676.14 2695.98,3682 2683.07,3682 ; 3361,3096 3361.88,3095.12 3384,3095.12 ; Amp2.8@3423.5,3075.87 3418.12,3075.87 3418,3075.75 3418,3075 3389.86,3075 3384,3080.86 3384,3095.12 ; Amp2.7@3423.5,3095.55 3384.43,3095.55 3384,3095.12 ; Amp2.6@3423.5,3115.24 3389.86,3115.24 3384,3109.38 3384,3095.12 ; Amp3.6@3536.5,575.16 3561.14,575.16 3567,581.02 3567,593 ; Amp3.7@3536.5,594.84 3536.61,594.72 3565.28,594.72 3567,593 ; Amp3.8@3536.5,614.53 3558.61,614.53 3567,606.14 3567,593 ; v1(3595,593) 3567,593
  Top Layer w25: v6(2668,3053.5) 2831.88,3053.5 ccw(c2840.74,3174.1) 2849.6,3053.5 2943.5,3053.5 2988,3098 v1(3159,3098) 3161,3096 3361,3096
  Top Layer w30: VR1.2@156.15,240 VR1.2@180,240 257.43,240
  Top Layer w50: J5.2@60,280 60.98,280.98 60.98,340.98 C1.a@165,445 177.87,445 204.67,418.2 206.8,418.2 257.43,367.57 257.43,240 257.43,98.01 256.73,97.31 256.73,76.5 C15.1@240.24,60
  Bottom Layer w10: 2294,1066.94 2303.07,1057.87 2303.34,1057.6 2303.34,822.7 2303.34,672.01 2306,669.35 v1(2306,668)
  Bottom Layer w25: v1(2657,499) 2834,676 3184,676 3356,504 3548,504 3595,551 v1(3595,593) ; v1(2684,3743) 2684,3752 2815,3883 3101,3883 3158,3826 v1@3158,3098
  Bottom Layer w70: C1.a@165,445 171.67,451.67 231.78,451.67 369,588.88 369,693 742.94,1066.94 2294,1066.94 2584.99,1066.94 2626,1107.94 2626,3011.5 v6(2668,3053.5)
AD1-PIN4: C5.1 L1.1 U1.4 | length 309.9
  Top Layer w10: C5.1@1355,570 1356.97,570 1381.97,545 1419.33,545 1429.33,535 1500.95,535 1524.21,511.73 1524.21,505.97 1547.48,482.7 U1.4@1625.39,482.7
AD1-PIN6: C9.1 L6.1 U1.6 | length 294
  Top Layer w10: L6.1@1365,516.22 1368.78,520 1460,520 1490,490 C9.1@1491.97,490 1496.97,485 1525,485 1567.3,442.7 U1.6@1625.39,442.7
AD1-PIN12: L5.1 R7.2 U1.12 | length 427.6
  Top Layer w10: R7.2@1280,410.24 1275,405.24 1275,370.86 1280.86,365 1500.36,365 1506.22,359.14 L5.1@1506.22,335 1506.22,330.67 1511.26,325.63 1515.59,325.63 1516.52,324.7 U1.12@1625.39,324.7
AD1-PIN14: C7.1 L3.1 L4.1 U1.14 | length 440.2
  Top Layer w10: L3.1@1365,298.11 1369.33,298.11 1374.37,303.15 1374.37,304.73 1380.23,310.58 1455.91,310.58 1491.5,275 C7.1@1493.46,275 ; C7.1@1506,265 1496,275 C7.1@1493.46,275 ; v1(1536,260) 1536,283.7 1534,285.7 ; v1(1543,194) 1556.11,207.11 L4.1@1580,207.11 ; U1.14@1625.39,285.7 1534,285.7 ; C7.1@1493.46,275 1504.17,285.7 1534,285.7
  Bottom Layer w10: v1(1536,260) 1536,202.35 1543,195.35 v1(1543,194)
AD1-PIN15: C6.1 L2.1 U1.15 | length 217.8
  Top Layer w10: L2.1@1500,155 1500,206.93 C6.1@1491.93,215 1525,215 1575.7,265.7 U1.15@1625.39,265.7
AD1-PIN24: C13.1 L10.1 U1.24 | length 151.1
  Top Layer w10: U1.24@1840.39,168.7 1840.2,168.5 1840.2,80.2 L10.1@1840,80 1888.07,80 C13.1@1898.07,70
AD1-PIN27: L4.2 U1.27 | length 432.7
  Top Layer w10: L4.2@1580,170.89 1580,167.89 1582,165.89 v8(1582,129.89) ; v1(1895.97,112.79) 1895.97,113.54 1899.39,116.96 U1.27@1899.39,168.7
  Bottom Layer w10: v8(1582,129.89) 1633.82,129.89 1636.62,127.09 1637.91,127.09 1667.06,97.94 1776.32,97.94 1791.39,113 1895.76,113 v1(1895.97,112.79)
AD1-PIN33: C10.1 L7.1 U1.33 | length 139.7
  Top Layer w10: U1.33@2075.39,245.7 2084,245.7 2085,246.7 2085,247 2149,247 C10.1@2156,240 2154.78,238.78 L7.1@2154.78,185
AD1-PIN41: C14.1 L11.1 U1.41 | length 213.7
  Top Layer w10: U1.41@2075.39,403.7 2076.39,404.7 2104.32,404.7 2104.62,405 2210,405 C14.1@2220,415 2230,415 2236.65,421.65 L11.1@2236.65,466.65
AD1-PIN44: C11.1 L8.1 U1.44 | length 243.4
  Top Layer w10: U1.44@2075.39,462.7 2128.72,462.7 2181.33,515.31 2206.42,515.31 2210,518.9 2210,530 C11.1@2223.07,530 2225,531.93 2225,588.78 L8.1@2223.78,590
AD1-PIN63: C12.1 L9.1 U1.63 | length 277.5
  Top Layer w10: C12.1@1541.93,570 1541.93,576.93 1545,580 1545,610.67 1555,620.67 L9.1@1555,625 1555,629.33 1560.04,634.37 1564.37,634.37 1589.25,659.25 1709.48,659.25 1720,648.73 1720,648.56 1721.39,647.16 1721.39,619.7 U1.63@1722.39,618.7
AD2-PIN4: C19.1 L13.1 U2.4 | length 173.5
  Top Layer w10: C19.1@3380,2118.46 3390,2128.46 3390,2140 3405,2155 L13.1@3405,2180 3405,2213.68 3391,2227.68 3391,2254 3392,2255 3391,2256 U2.4@3391,2275
AD2-PIN6: C22.1 L16.1 U2.6 | length 262.4
  Top Layer w10: L16.1@3430,2045 3430,2049.33 3420,2059.33 3420,2136.5 3448.5,2165 3455,2165 C22.1@3455,2173.46 3455,2210 3431,2234 U2.6@3431,2275
AD2-PIN12: L12.1 R16.2 U2.12 | length 390.1
  Top Layer w10: R16.2@3540,1950 3540,1953.94 3580.64,1994.58 3580.64,2164.74 3590.86,2174.96 3604.96,2174.96 L12.1@3610,2180 3605.67,2180 3600.63,2185.04 3600.63,2195.73 3554.06,2242.3 3554.06,2245.94 3550,2250 3550,2274 U2.12@3549,2275
AD2-PIN14: C21.1 L15.1 L22.1 U2.14 | length 449.9
  Top Layer w10: U2.14@3587,2260 3588,2261 U2.14@3588,2275 ; U2.14@3590,2255 3590,2240.15 3609.09,2221.06 3648.94,2221.06 3670,2200 ; L15.1@3646.89,2040 3646.89,2044.33 3641.85,2049.37 3640.86,2049.37 3635,2055.23 3635,2128.03 3656.97,2150 3670,2150 C21.1@3670,2165 3670,2200 ; v1(3693,2206) 3692.04,2205.04 3675.04,2205.04 3670,2200 ; L22.1@3759,2251.78 3759,2217.35 3761,2215.35 v1(3761,2214)
  Bottom Layer w10: v1(3693,2206) 3751.65,2206 3759.65,2214 v1(3761,2214)
AD2-PIN15: C20.1 L14.1 U2.15 | length 285.4
  Top Layer w10: U2.15@3608,2275 3609,2274 3609,2240.86 3614.86,2235 3715,2235 3735,2215 C20.1@3735,2170 ; C20.1@3735,2165 C20.1@3735,2170 ; L14.1@3795,2180 3745,2180 C20.1@3735,2170
AD2-PIN24: C26.1 L20.1 U2.24 | length 180.7
  Top Layer w10: U2.24@3705,2490 3836.89,2490 L20.1@3840,2493.11 3840,2536.07 C26.1@3839,2537.07
AD2-PIN27: L22.2 U2.27 | length 339.3
  Top Layer w10: U2.27@3705,2549 3751,2549 v1(3759,2541) ; L22.2@3759,2288 v1(3759,2313)
  Bottom Layer w10: v1(3759,2313) 3794,2348 3794,2506 v1(3759,2541)
AD2-PIN33: C23.1 L17.1 U2.33 | length 179.9
  Top Layer w10: U2.33@3628,2725 3628,2839.89 L17.1@3630,2841.89 3631.89,2840 3670.31,2840 3685,2854.69 C23.1@3685,2855
AD2-PIN41: C27.1 L21.1 U2.41 | length 230.1
  Top Layer w10: U2.41@3470,2725 3470,2777.18 3456.5,2790.68 3456.5,2816.64 3462.36,2822.5 3490.61,2822.5 3500.63,2832.52 3500.63,2836.85 3505.67,2841.89 L21.1@3510,2841.89 3511.89,2840 3556.46,2840 C27.1@3570,2853.54
AD2-PIN44: C24.1 L18.1 U2.44 | length 183.9
  Top Layer w10: C24.1@3405,2853.54 C24.1@3411,2847.54 ; U2.44@3411,2725 C24.1@3411,2847.54 ; L18.1@3460,2841.89 3458.11,2840 3418.54,2840 C24.1@3411,2847.54
AD2-PIN63: C25.1 L19.1 U2.63 | length 329.8
  Top Layer w10: U2.63@3255,2372 3254,2371 3214.79,2371 3208.94,2365.14 3208.94,2196.06 3220,2185 3250,2185 L19.1@3255,2180 3260,2175 3305,2175 C25.1@3310,2170
AD3-PIN4: C32.1 L24.1 U3.4 | length 225.2
  Top Layer w10: C32.1@3320,1010 3320,1011.97 3345,1036.97 L24.1@3345,1070 3345,1074.33 3391,1120.33 3391,1184 3390,1185 3391,1186 U3.4@3391,1205
AD3-PIN6: C35.1 L27.1 U3.6 | length 296.5
  Top Layer w10: L27.1@3373.78,935 3371.38,937.4 3371.38,1031.34 3400,1059.96 C35.1@3400,1061.93 3400,1063.9 3431,1094.9 3431,1184 3432,1185 3431,1186 U3.6@3431,1205
AD3-PIN12: L23.1 R28.2 U3.12 | length 413.5
  Top Layer w10: R28.2@3509.88,830 3509.88,890.31 3524.37,904.8 3524.37,1041.81 L23.1@3570.67,1088.11 ; U3.12@3549,1205 3549,1182 3554.06,1176.94 3554.06,1109.05 3565.63,1097.48 3565.63,1093.15 L23.1@3570.67,1088.11 ; L23.1@3575,1088.11 L23.1@3570.67,1088.11